# Altium PCB remote.PcbDoc (part 1 of 2)
Units mm, origin at the board's own origin, x right, y up, seen from the top; angles counter-clockwise.
Board outline 60.1 x 131.84 mm, 4 copper layers (Top Layer, Int1 (GND), Int2 (PWR), Bottom Layer), stack 1.569 mm thick; 97 components, 91 nets, 326 pads, 125 vias.
Unrouted connection lines stored in the file: 43.
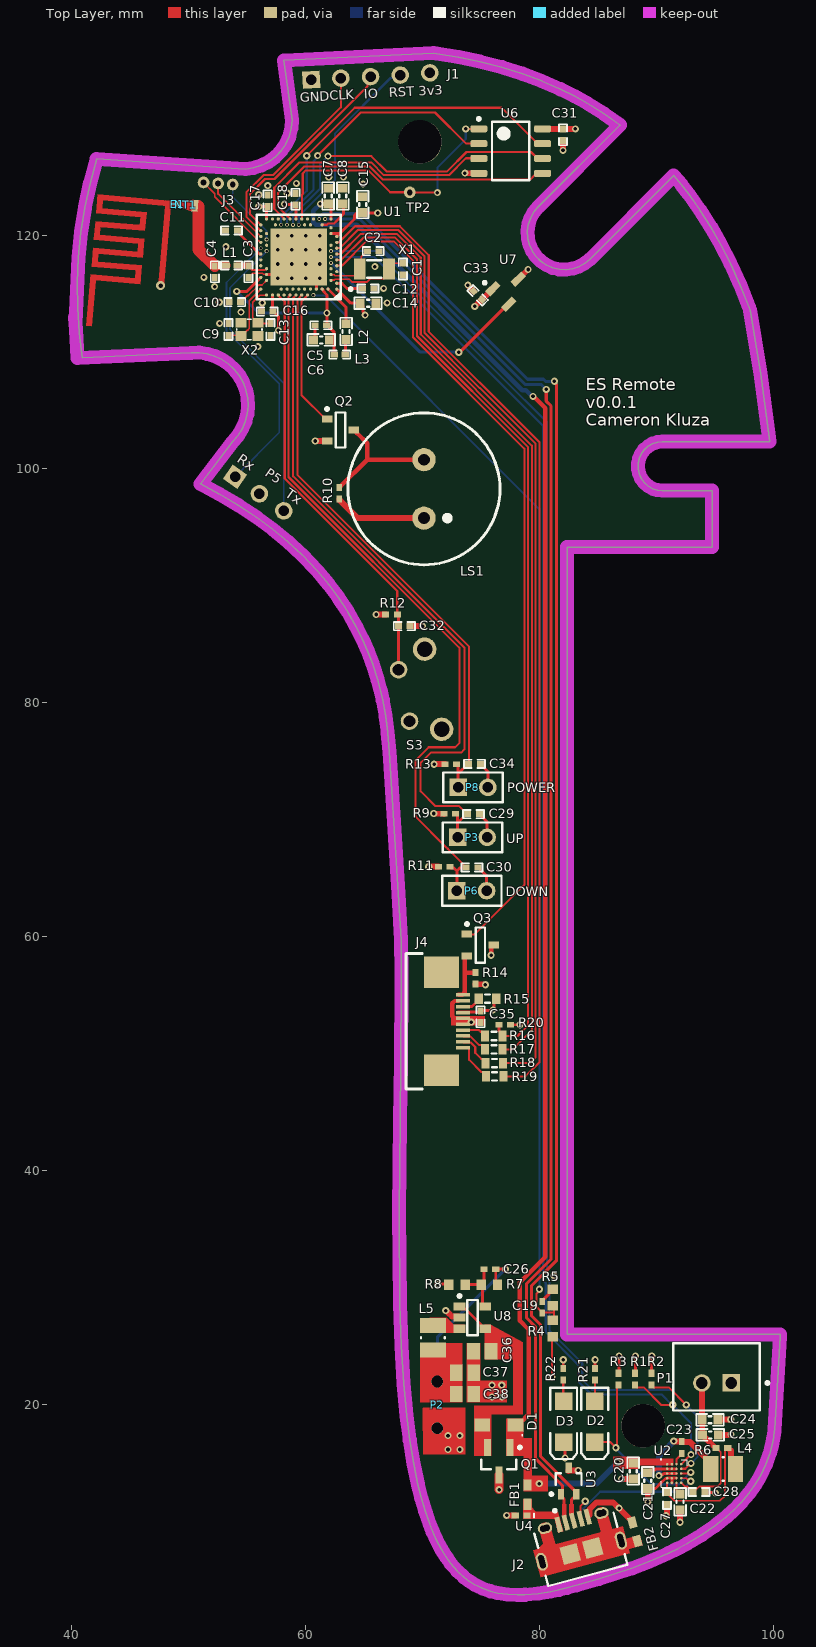
[diagram p0: Top Layer view]
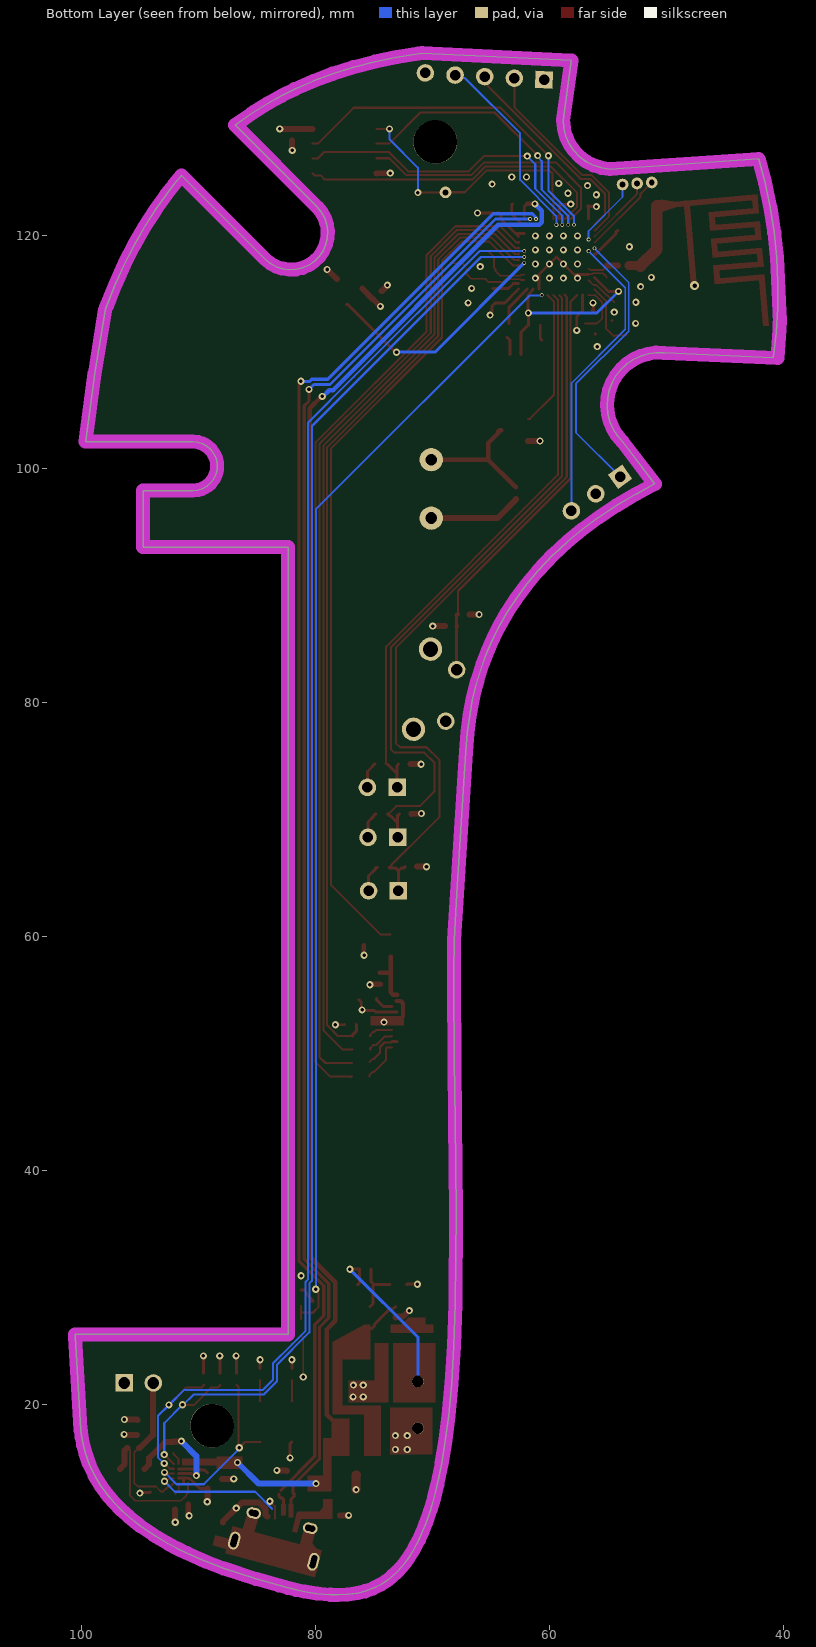
[diagram p1: Bottom Layer view, seen from below]
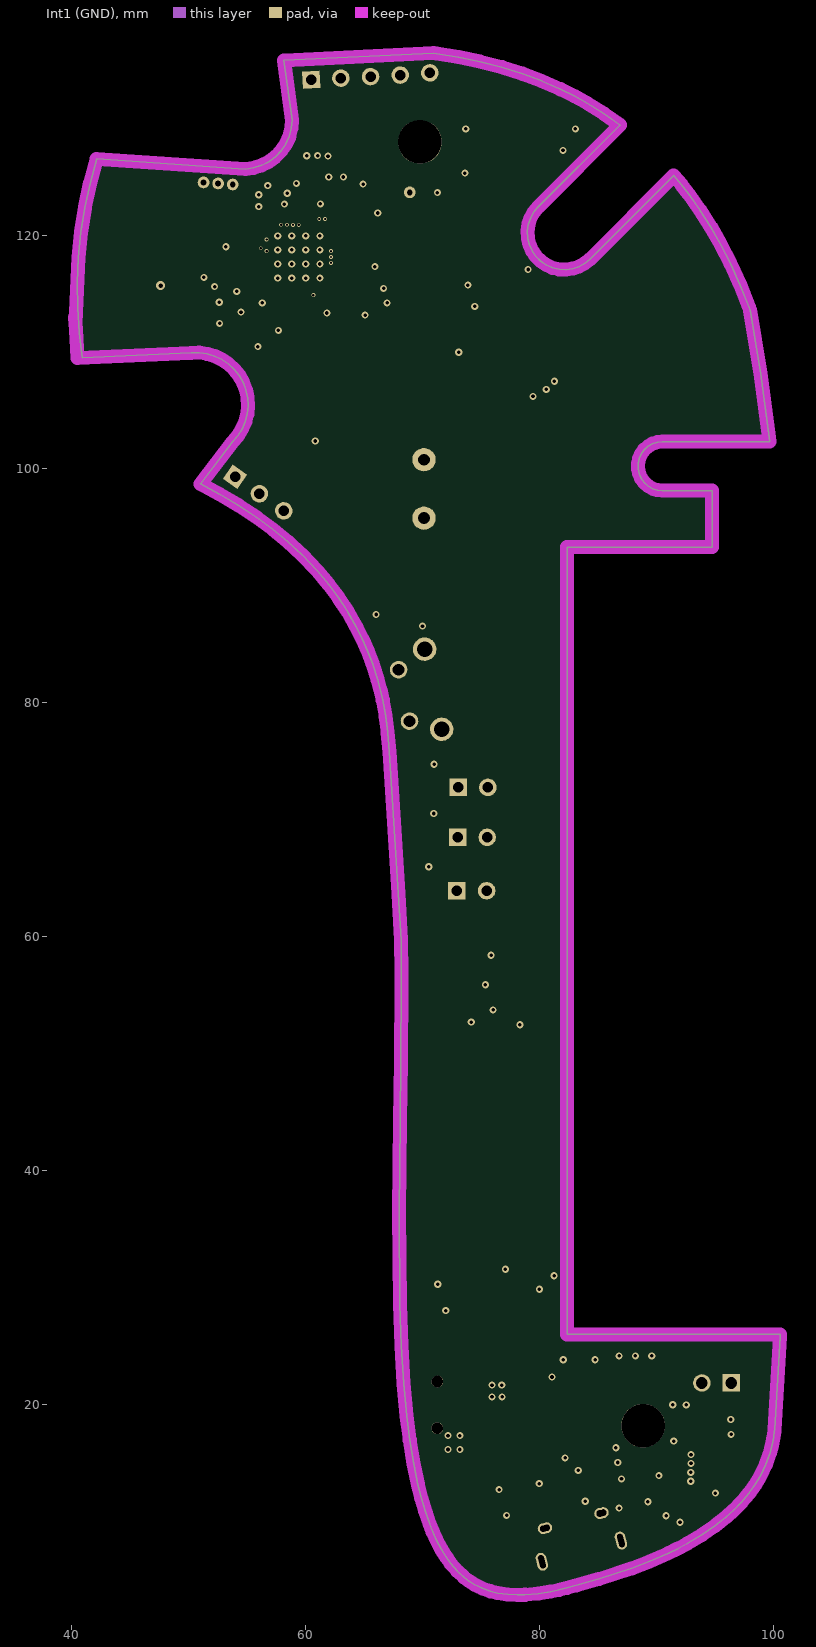
[diagram p2: Int1 (GND)]
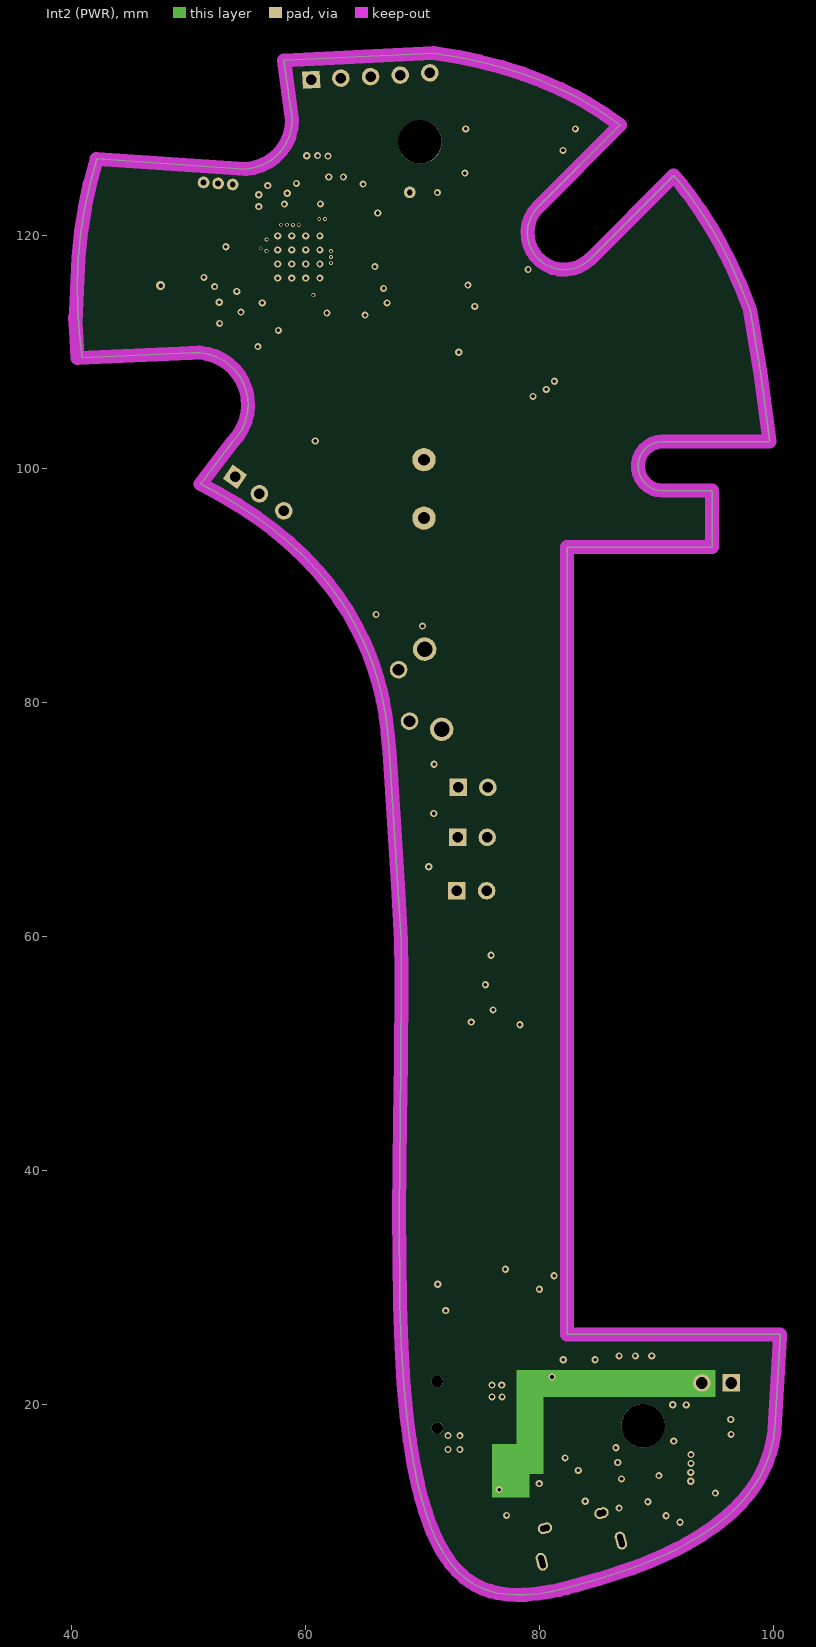
[diagram p3: Int2 (PWR)]

## Layer stack, top to bottom
Top Solder: solder mask 0.0254, SM-001, Dk 4
Top Layer: signal copper 0.035
Dielectric 1: prepreg 0.1999, PP-017, Dk 4.3
Int1 (GND): signal copper 0.0175
Dielectric 3: core 1.0643, Core-039, Dk 4.8
Int2 (PWR): signal copper 0.0175
Dielectric 5: prepreg 0.1999, PP-017, Dk 4.3
Bottom Layer: signal copper 0.035
Bottom Solder: solder mask 0.0254, SM-001, Dk 4

## Board outline
54.862,125.645 42.143,126.51 41.58,124.438 41.132,122.338 40.8,120.216 40.585,118.08 40.487,115.935 40.508,113.787 40.646,111.644 40.902,109.512 50.226,109.933 50.908,109.942 51.583,109.848 52.235,109.652 52.851,109.358 53.414,108.975 53.912,108.51 54.334,107.974 54.669,107.381 54.91,106.743 55.051,106.076 55.089,105.396 55.023,104.717 54.854,104.057 54.587,103.43 54.227,102.851 53.783,102.333 51.019,98.72 52.642,97.851 54.322,96.856 55.847,95.845 57.233,94.818 58.465,93.8 59.689,92.671 61.019,91.274 61.963,90.148 62.831,88.978 63.628,87.759 64.35,86.491 64.868,85.453 65.333,84.391 65.747,83.306 66.176,81.967 66.405,81.118 66.605,80.258 66.858,78.875 67.031,77.462 67.167,75.81 67.294,73.865 67.677,67.781 67.938,63.663 68.178,59.716 68.193,56.92 68.193,56.001 68.15,49.37 68.085,44.25 68.009,36.454 68.073,28.611 68.2,25.015 68.398,21.799 68.654,19.035 68.916,16.956 69.24,14.955 69.609,13.166 69.894,12.029 70.229,10.892 70.606,9.808 70.882,9.119 71.195,8.428 71.608,7.64 72.018,6.97 72.417,6.411 72.968,5.772 73.571,5.215 73.99,4.898 74.449,4.61 75.129,4.276 75.805,4.035 76.431,3.882 77.286,3.758 78.126,3.719 78.759,3.735 79.913,3.832 80.951,3.998 81.686,4.158 82.371,4.33 83.151,4.539 85.116,5.084 87.896,5.992 89.434,6.585 91.029,7.288 91.836,7.685 92.642,8.114 93.885,8.852 95.025,9.632 95.97,10.382 96.64,10.989 97.259,11.623 97.931,12.419 98.424,13.108 98.913,13.927 99.364,14.878 99.68,15.758 99.891,16.555 100.019,17.212 100.095,17.731 100.109,17.839 100.586,25.818 100.586,25.997 82.373,25.997 82.373,93.319 94.776,93.319 94.776,98.139 90.526,98.139 90.089,98.185 89.672,98.321 89.292,98.54 88.966,98.834 88.707,99.189 88.529,99.59 88.438,100.02 88.438,100.459 88.529,100.888 88.707,101.289 88.966,101.644 89.292,101.938 89.672,102.157 90.089,102.293 90.526,102.339 99.68,102.339 99.638,102.692 98.909,108.152 98.019,113.589 97.923,113.844 97.184,115.7 96.358,117.531 95.525,119.165 94.647,120.701 93.725,122.147 92.759,123.506 92.137,124.308 91.486,125.093 84.354,117.961 83.907,117.59 83.399,117.307 82.848,117.122 82.272,117.042 81.691,117.069 81.126,117.202 80.594,117.436 80.114,117.765 79.703,118.176 79.375,118.655 79.14,119.187 79.007,119.753 78.98,120.334 79.06,120.909 79.245,121.46 79.528,121.968 79.899,122.415 86.892,129.409 85.503,130.39 84.054,131.288 82.948,131.9 81.812,132.466 80.196,133.175 78.555,133.791 76.786,134.351 74.932,134.833 73.075,135.219 71.213,135.521 70.933,135.56 58.148,134.935 58.856,129.84 58.797,129.133 58.619,128.446 58.327,127.799 57.932,127.211 57.443,126.697 56.874,126.273 56.242,125.951 55.565,125.739

## Design rules (kind name [scope] priority, off if disabled: settings)
BoardOutlineClearance [All] p1: gap=0.254 ignorepadtopadclearanceinfootprint=FALSE except(0: Arc-SplitContinuation Track-SplitContinuation SMDPad-SplitContinuation THPad-SplitContinuation Via-SplitContinuation Fill-SplitContinuation Poly-SplitContinuation Region-SplitContinuation Text-SplitContinuation)
Clearance Polygon_ANT [(InNamedPolygon('Top_Layer-GND')) or  (InNamedPolygon('Mid_Layer_1-GND')) or (InNamedPolygon('Mid_Layer_2-GND')) or (InNamedPolygon('Bottom_Layer-GND')) vs InNet('PCB_ANT')] p1: gap=0.254 ignorepadtopadclearanceinfootprint=FALSE
Clearance Polygon [(InNamedPolygon('Top_Layer-GND')) or  (InNamedPolygon('Mid_Layer_1-GND')) or (InNamedPolygon('Mid_Layer_2-GND')) or (InNamedPolygon('Bottom_Layer-GND'))] p2: gap=0.254 ignorepadtopadclearanceinfootprint=FALSE except(0: Arc-Hole Track-Hole SMDPad-Hole THPad-Hole Via-Hole Fill-Hole Poly-Hole Region-Hole Text-Hole)
Clearance Clearance_Top [OnLayer('Top Layer')] p3: gap=0.145 ignorepadtopadclearanceinfootprint=FALSE except(0: Arc-Hole Track-Hole SMDPad-Hole THPad-Hole Via-Hole Fill-Hole Poly-Hole Region-Hole Text-Hole)
Clearance [All] p4: gap=0.15 ignorepadtopadclearanceinfootprint=FALSE
ComponentClearance [All] p1 off: gap=0.254 collisioncheckmode=3 verticalgap=0.254 showdistances=FALSE
DiffPairsRouting [All] p1: maxlimit=0.254 minlimit=0.127 mostfreqgap=0.254 toplayer_minwidth=0.178 toplayer_maxwidth=0.381 toplayer_prefwidth=0.351 midlayer1_mingap=0.254 midlayer1_minwidth=0.381 midlayer1_maxwidth=0.381 midlayer1_prefwidth=0.381 midlayer2_mingap=0.254 midlayer2_minwidth=0.381 midlayer2_maxwidth=0.381 midlayer2_prefwidth=0.381 bottomlayer_minwidth=0.178 bottomlayer_maxwidth=0.381 bottomlayer_prefwidth=0.351 maxuncoupledlength=12.7
FabricationTestPointUsage TestPointUsage [All] p1: valid=0 allowmultiple=FALSE
FabricationTestpoint Testpoint [All] p1: side=3 testpointundercomponent=TRUE minsize=1.016 maxsize=2.54 preferedsize=1.524 minholesize=0 maxholesize=1.016 preferedholesize=0.813 testpointgrid=0.025 allowsidetop=TRUE allowsidebottom=TRUE usegrid=TRUE gridtolerance=0
Height [All] p1 off: minheight=0 maxheight=25.4 prefheight=12.7
HoleSize [All] p1: absolutevalues=TRUE maxlimit=4.064 minlimit=0.178 maxpercent=80.000 minpercent=20.000
MinimumAnnularRing [All] p1 off: minimumring=0.152
PolygonConnect PolygonConnect_1 [isVia and innet(gnd)] p1: connectstyle=Direct reliefconductorwidth=0.254 reliefentries=4 polygonreliefangle="90 Angle" airgapwidth=0.254
PolygonConnect [All] p2: connectstyle=Relief reliefconductorwidth=0.254 reliefentries=4 polygonreliefangle="90 Angle" airgapwidth=0.254
RoutingVias [All] p1: holewidth=0.305 width=0.61 viastyle="Through Hole" minholewidth=0.203 minwidth=0.457 maxholewidth=0.61 maxwidth=0.61
SilkToSilkClearance [All] p1: silktosilkclearance=0.152
SilkToSolderMaskClearance SilkscreenOverComponentPads [IsPad] p1: minsilkscreentomaskgap=0 clearancetoexposedcopper=TRUE
SolderMaskExpansion [All] p1: expansion=0.076 istentingtop=FALSE
Width [All] p1: maxlimit=2 minlimit=0.145 preferedwidth=0.15 minimp=50.000000 maximp=50.000000 favimp=50.000000
22 further rules are at their usual default settings.

## Classes and differential pairs
differential pair class USB: USB
net class UART: A8 A10 A12 A14 A16 A20 K2 M2 P2 P23 R24
net class QSPI: AC15 AC17 AC19 AD12 AD16 AD18
net class LCD: J1 L1 N1 R1 U1
component class Power: C19 C20 C21 C22 C23 C24 C25 C26 C27 C28 C36 C37 C38 D1 D2 D3 FB1 FB2 J2 L4 L5 P1 P2 Q1 R1 R2 R3 R4 R5 R6 R7 R8 R21 R22 U2 U3 U4 U8
component class Peripherals: C29 C30 C31 C32 C33 C34 C35 J1 LS1 P3 P5 P6 P8 Q2 Q3 R9 R10 R11 R12 R13 R14 R15 R16 R17 R18 R19 R20 S3 TP2 U6 U7
component class nrf52840: C1 C2 C3 C4 C5 C6 C7 C8 C9 C10 C11 C12 C13 C14 C15 C16 C17 C18 E1 J3 L1 L2 L3 NT1 U1 X1 X2
differential pair USB: +USB_P -USB_N

## Components (designator, comment, footprint, x,y, rotation, side; value= is the part's Value field where it differs from the comment)
C1 "0402/NP0" CAPC1005X04L 68.326,117.094 r270 top value=12pF
C2 "0402/NP0" CAPC1005X04L 65.794,118.618 r0 top value=12pF
C3 "0402/NP0" CAPC1005X04L 55.115,116.867 r270 top value=0.8pF
C4 "0402/NP0" CAPC1005X04L 52.242,116.867 r270 top value=0.5pF
C5 "0402/X7R" CAPC1005X04L 61.312,112.287 r180 top value=47nF
C6 "0603/X7R" CAPC1608X06L 61.355,111.029 r180 top value=1uF
C7 "0603/X7S" CAPC1608X06L 61.94,123.332 r90 top value=4.7uF
C8 "0603/X7R" CAPC1608X06L 63.198,123.332 r90 top value=4.7uF
C9 "0402/NP0" CAPC1005X04L 53.409,111.927 r270 top value=12pF
C10 "0402/NP0" CAPC1005X04L 53.948,114.262 r180 top value=100pF
C11 "0402/NP0" CAPC1005X04L 53.67,120.396 r180 top value=802pF
C12 "0402/X7R" CAPC1005X04L 65.353,115.43 r0 top value=100nF
C13 "0402/NP0" CAPC1005X04L 57.001,111.927 r90 top value=12pF
C14 "0603/X7R" CAPC1608X06L 65.353,114.173 r0 top value=1uF
C15 "0603/X7R" CAPC1608X06L 64.897,122.606 r90 top value=4.7uF
C16 "0402/X7R" CAPC1005X04L 56.732,113.454 r180 top value=100nF
C17 "0402/X7R" CAPC1005X04L 56.769,122.936 r90 top value=100nF
C18 "0402/X7R" CAPC1005X04L 59.156,123.063 r270 top value=100nF
C19 "0402/X7R" 0402 80.239,28.321 r90 top value=10nF
C20 "0603/X7R" CAPC1608X06L 88.017,14.307 r270 top value=1uF
C21 "0603/X7S" CAPC1608X06L 89.262,13.494 r270 top value=4.7uF
C22 "0603/X7R" CAPC1608X06L 92.024,11.684 r270 top value=1uF
C23 "0402/16V/X7R" 0402 92.177,16.332 r270 top value=33nF
C24 "0603/X5R" CAPC1608X06L 94.59,18.694 r0 top value=10uF
C25 "0603/X5R" CAPC1608X06L 94.615,17.399 r0 top value=10uF
C26 "0402/NP0" 0402 75.768,31.572 r180 top value=22pF
C27 "0402/X7R" CAPC1005X04L 90.913,11.97 r90 top value=0.1uF
C28 "0402/X7R" CAPC1005X04L 93.65,12.522 r180 top value=0.1uF
C29 "0402/X7R" CAPC1005X04L 74.371,70.485 r180 top value=0.1uF
C30 "0402/X7R" CAPC1005X04L 74.244,65.938 r180 top value=0.1uF
C31 "0402/X7R" CAPC1005X04L 82.017,128.575 r90 top value=0.1uF
C32 "0402/X7R" CAPC1005X04L 68.453,86.563 r180 top value=0.1uF
C33 "0402/X7R" CAPC1005X04L 74.723,114.838 r315 top value=0.1uF
C34 "0402/X7R" CAPC1005X04L 74.447,74.778 r180 top value=0.1uF
C35 "0402/X7R" CAPC1005X04L 74.981,53.162 r90 top value=0.1uF
C36 "0805/X5R" C0805 75.121,24.562 r180 top value=22uF
C37 "0805/X5R" C0805 73.635,22.708 r0 top value=22uF
C38 "0805/X5R" C0805 73.635,20.904 r0 top value=22uF
D1 "MBR120" SODFL360X98-2N 76.53,18.237 r180 top
D2 "Charge stat (yellow)" 3.2X1.6X1.1 84.734,18.542 r270 top
D3 "PWR On (green)" 3.2X1.6X1.1 82.067,18.542 r270 top
E1 "Cypress AN91445 MIFA" Cypress_AN91445_MIFA 44.577,119.507 r85 top
FB1 "180R/2A" MURA-BLM18PG_KG-B25-CHIP-2_V2 78.994,12.294 r270 top
FB2 "180R/2A" MURA-BLM18PG_KG-B25-CHIP-2_V2 88.163,9.119 r105 top
J1 "SWD" "SWD 5-pin" 65.561,133.547 r3 top
J2 "10118194-0001LF" FCI-10118194-0001LF-5_V 83.241,8.767 r15 top
J3 "DBG_GPIO" DBG_Header 52.527,124.409 r86 top
J4 "CFAF128128B1" 68711014022 73.482,52.769 r270 top
L1 "4.7nH" INDC1005X04L 53.679,117.405 r180 top
L2 "10uH" INDC1608X06L 63.467,111.748 r90 top
L3 "15nH" INDC1005X04L 62.928,109.772 r0 top
L4 "1uH/2.7A" INDC2520X12N 95.707,14.478 r0 top value=1uH
L5 "2.2uH/2.27A" INDC2520X12N 70.891,25.717 r270 top value=1uH
LS1 "PS1240P02BT" "Passive Buzzer" 70.129,98.298 r90 top
NT1 "Net Tie" MIFA_NET_TIE 49.779,122.57 r355 top net-tie
P1 "Battery" JST-B2B-XH-A_V 95.143,21.844 r180 top
P2 "Header 2" Current_TP 71.272,19.964 r90 top
P3 "UP" HDR1X2 73,68.504 r0 top
P5 "Header 3" UART 56.06,97.875 r325 top
P6 "DOWN" HDR1X2 72.949,63.932 r0 top
P8 "POWER" HDR1X2 73.05,72.771 r0 top
Q1 "SSM3J378R" SOT-23_M 76.53,15.164 r270 top
Q2 "2N7002NXBKR" SOT190P230X110-3N 62.992,103.327 r0 top
Q3 "2N7002NXBKR" SOT190P230X110-3N 74.955,59.284 r0 top
R1 "10k/0402" 0402 88.189,22.174 r90 top
R2 "10k/0402" 0402 89.586,22.174 r90 top
R3 "10k/0402" 0402 86.766,22.174 r90 top
R4 "4.02M/0603" 1608[0603] 81.153,26.492 r270 top
R5 "10M/0603" 1608[0603] 81.128,29.154 r270 top
R6 "68m/0.25W/0402" 0402 95.606,16.281 r0 top
R7 "0603/210k" 1608[0603] 75.717,30.251 r0 top
R8 "0603/47k" 1608[0603] 72.949,30.251 r0 top
R9 "10k/0402" 0402 72.339,70.51 r180 top
R10 "10k/0402" 0402 62.89,97.917 r270 top
R11 "10k/0402" 0402 71.857,65.989 r180 top
R12 "10k/0402" 0402 67.361,87.554 r180 top
R13 "10k/0402" 0402 72.415,74.752 r180 top
R14 "100k/0402" 0402 74.524,56.439 r90 top
R15 "Resistor" J1-0603 75.565,54.712 r0 top value=0
R16 "Resistor" J1-0603 76.098,51.511 r0 top value=0
R17 "Resistor" J1-0603 76.098,50.368 r0 top value=0
R18 "Resistor" J1-0603 76.149,49.2 r0 top value=0
R19 "Resistor" J1-0603 76.175,48.057 r0 top value=0
R20 "100k/0402" 0402 77.038,52.476 r180 top
R21 "10k/0402" 0402 84.76,22.581 r90 top
R22 "10k/0402" 0402 82.042,22.581 r90 top
S3 "PTS645VJK" SW_CK_PTS645VJK612LFS 69.672,80.899 r282 top
TP2 "TP_Via" TP_Via 68.91,123.647 r90 top
U1 "NRF52840-QIAA-R7" LIBRARYSOURCE=Vault 59.426,118.124 r180 top
U2 "BQ24157YFFR" BQ24157YFFR 91.526,14.103 r0 top
U3 "ESD7002" SOT65P220X100-3N 82.499,13.462 r90 top
U4 "TPD1E05U06DPYR" 0402-A 78.435,10.516 r180 top
U6 "IS25LQ040B" SOIC127P600X175-8N 77.546,127.178 r0 top
U7 "DRV5053" SOT190P237X112-3N 77.445,115.494 r45 top
U8 "AP3429AKTTR-G1" SOT95P280X100-5N 74.27,27.432 r0 top
X1 "32.768kHz" XTAL_3215 65.893,117.094 r0 top
X2 "32MHz" BT-XTAL_2016 55.205,111.927 r0 top

## Footprints (in the part's own frame and the unit in brackets; to place one, negate y for a bottom-side part, rotate by r counter-clockwise, add the part's x,y. Pads: shape width x height; smd on the part's side, far side on the other; paste and mask are expansions set on the pad)
3.2X1.6X1.1 [mm] "SMT LED; 2 Flat Leads"
  rect 1.5x1.5 smd: 1(-1.75,0) 2(1.75,0)
  silkscreen extent -2.9,-1.15 3.2,1.15
0402 [mm] "Chip Capacitor, Body 1.0x0.5mm, IPC High Density"
  rect 0.6x0.5 smd: 1(-0.5,0) 2(0.5,0)
  body extent -0.55,-0.3 0.55,0.3, height 1.3
0402-A [mm] "Chip Inductor, Body 1.0x0.5mm, IPC High Density"
  rect 0.6x0.5 smd: 1(-0.5,0) 2(0.5,0)
  silkscreen extent -1.1,-0.15 -1.1,0.15, body extent -0.55,-0.3 0.55,0.3, height 0.55
1608[0603] [mm] "Chip Capacitor, Body 1.6x0.8mm, IPC High Density"
  rect 0.8x0.9 smd: 1(-0.7,0) 2(0.7,0)
  body extent -0.87,-0.48 0.87,0.48, height 1.3
68711014022 [mm] "10 Position FPC Connector Contacts, Top 0.020\" (0.50mm) Surface Mount, Right Angle"
  rect 0.3x1.2 smd: 1(-2.25,0) 2(-1.75,0) 3(-1.25,0) 4(-0.75,0) 5(-0.25,0) 6(0.25,0) 7(0.75,0) 8(1.25,0) 9(1.75,0) 10(2.25,0)
  rect 2.7x3 smd: MP1(-4.18,-1.86) MP2(4.18,-1.86)
  silkscreen extent -5.8,-4.87 5.8,-3.5, body extent -5.7,-4.8 5.7,0.3, height 2.06
BQ24157YFFR [mm]
  round 0.2 smd: A1(-0.6,0.8) A2(-0.2,0.8) A3(0.2,0.8) A4(0.6,0.8) B1(-0.6,0.4) B2(-0.2,0.4) B3(0.2,0.4) B4(0.6,0.4) C1(-0.6,0) C2(-0.2,0) C3(0.2,0) C4(0.6,0) D1(-0.6,-0.4) D2(-0.2,-0.4) D3(0.2,-0.4) D4(0.6,-0.4) E1(-0.6,-0.8) E2(-0.2,-0.8) E3(0.2,-0.8) E4(0.6,-0.8)
  silkscreen extent -1.18,-1.17 1.1,1.26, body extent -1,-1.02 1,1.02, height 1.27
BT-XTAL_2016 [mm]
  rect 0.95x0.85 smd: 1(-0.725,-0.575) 2(0.725,-0.575) 3(0.725,0.575) 4(-0.725,0.575)
  silkscreen extent -1.08,-0.88 1.08,0.88, body extent -1.05,-0.85 1.05,0.85, height 0.56
C0805 [mm] "Chip Capacitor, Body 2.0x1.3mm, IPC High Density"
  rect 1.1x1.4 smd: 1(-0.75,0) 2(0.75,0)
  body extent -1.1,-0.72 1.1,0.72, height 1.4
CAPC1005X04L [mm]
  rect 0.6x0.5 smd: 1(-0.5,0) 2(0.5,0)
  silkscreen extent -0.9,-0.35 0.9,0.35, body extent -0.51,-0.25 0.51,0.25, height 0.5
CAPC1608X06L [mm]
  rect 0.75x0.8 smd: 1(-0.675,0) 2(0.675,0)
  silkscreen extent -1.17,-0.5 1.18,0.5, body extent -0.8,-0.43 0.8,0.43, height 0.8
Current_TP [mm]
  round 1 hole 1 mask+0: 1(-2,0)
  round 1 hole 1 paste+0 mask+0: 2(2,0)
  Top Layer circle w1.5: c2,0 r0.508
  Top Layer circle w1.5: c-2,0 r0.508
  Top Layer region: 0.25,-1.27 2.21,-1.27 2.21,1.27 0.25,1.27
  Top Layer region: -2.21,-1.27 -0.25,-1.27 -0.25,1.27 -2.21,1.27
Cypress_AN91445_MIFA [mil] "Cypress app note 91445 MIFA reference implementation for BLE"
  rect 20x20 smd paste+0 mask+4: 1(138,-163.5)
  Top Layer region: -144.85,-144.22 148.15,-144.22 148.15,-124.22 -144.85,-124.22
  Top Layer region: -296.85,85.77 -121.85,85.77 -121.85,105.77 -296.85,105.77
  Top Layer region: -121.85,-64.23 -121.85,105.77 -141.85,105.77 -141.85,-64.23
  Top Layer region: -141.85,-64.23 -76.85,-64.23 -76.85,-44.23 -141.85,-44.23
  Top Layer region: -76.85,-64.23 -76.85,105.77 -96.85,105.77 -96.85,-64.23
  Top Layer region: -96.85,85.77 -31.85,85.77 -31.85,105.77 -96.85,105.77
  Top Layer region: -31.85,-64.23 -31.85,105.77 -51.85,105.77 -51.85,-64.23
  Top Layer region: -51.85,-64.23 13.15,-64.23 13.15,-44.23 -51.85,-44.23
  Top Layer region: 13.15,-64.23 13.15,105.77 -6.85,105.77 -6.85,-64.23
  Top Layer region: -6.85,85.78 58.15,85.78 58.15,105.78 -6.85,105.78
  Top Layer region: 58.15,-64.23 58.15,105.77 38.15,105.77 38.15,-64.23
  Top Layer region: 38.15,-64.23 103.15,-64.23 103.15,-44.23 38.15,-44.23
  Top Layer region: 103.15,-64.23 103.15,105.77 83.15,105.77 83.15,-64.23
  Top Layer region: 83.15,85.77 148.15,85.77 148.15,105.77 83.15,105.77
  Top Layer region: 148.15,-174.23 148.15,105.77 128.15,105.77 128.15,-174.23
DBG_Header [mm]
  round 1 hole 0.5: 1(0,1.25) 2(0,0) 3(0,-1.25)
FCI-10118194-0001LF-5_V [mm] "SMD, 5-Leads, Body 7x5mm, Pitch 0.65 mm"
  rect 0.4x1.35 smd: 1(-1.3,1.35) 2(-0.65,1.35) 3(0,1.35) 4(0.65,1.35) 5(1.3,1.35)
  oval 1.25x0.95 hole 0.55 slot 0.85 at 0 deg: 6(-2.5,1.35) 7(2.5,1.35)
  oval 0.9x1.55 hole 0.5 slot 1.15 at 90 deg: 8(-3.5,-1.35) 9(3.5,-1.35)
  rect 1.5x1.55 smd: 10(-1,-1.35) 11(1,-1.35)
  Top Layer region: -2.3,-2.125 -2.3,-0.575 -3.5,-0.575 -3.5,-2.125
  Top Layer region: 3.5,-2.125 3.5,-0.575 2.3,-0.575 2.3,-2.125
  silkscreen extent -3.5,-3.5 3.5,2.7, body extent -4.02,-4.03 4.02,1.55, height 2.72
HDR1X2 [mm] "Connector; Header; 2 Position"
  rect 1.5x1.5 hole 0.9: 1(0,0)
  round 1.5 hole 0.9: 2(2.54,0)
  silkscreen extent -1.27,-1.27 3.81,1.27
INDC1005X04L [mm]
  rect 0.65x0.5 smd: 1(-0.475,0) 2(0.475,0)
  silkscreen extent -0.9,-0.35 0.9,0.35, body extent -0.5,-0.3 0.5,0.3, height 0.5
INDC1608X06L [mm] "Chip Inductor, 2-Leads, Body 1.6x0.8mm, IPC High Density"
  rect 0.75x0.8 smd: 1(-0.675,0) 2(0.675,0)
  silkscreen extent -1.18,-0.5 1.18,0.5, body extent -0.8,-0.48 0.8,0.48, height 0.8
INDC2520X12N [mm] "Chip Inductor, 2-Leads, Body 2.50x2.00mm, IPC Medium Density"
  rect 1.29x2.22 smd: 1(-1.055,0) 2(1.055,0)
  silkscreen extent -0.05,-1.01 0.05,1.01, body extent -1.35,-1.1 1.35,1.1, height 1.2
J1-0603 [mm] "Chip Resistor, Body 1.6x0.8mm, IPC High Density"
  rect 0.7x0.9 smd: 1(-0.75,0) 2(0.75,0)
  silkscreen extent -0.2,-0.35 0.2,0.35, body extent -0.85,-0.48 0.85,0.48, height 0.9
JST-B2B-XH-A_V [mm] "Header, 2-Leads, Body 7.4x5.75mm, Pitch 2.5mm"
  rect 1.5x1.5 hole 1: 1(-1.25,0)
  round 1.5 hole 1: 2(1.25,0)
  silkscreen extent -4.47,-3.4 3.7,2.35, body extent -3.7,-3.4 3.7,2.35, height 7
LIBRARYSOURCE=Vault [mm]
  rect 4.85x4.85 smd mask+0.05: 74(0,0)
  round 0.275 smd paste+0.012 mask+0.05: A8(-1.25,3.25) A10(-0.75,3.25) A12(-0.25,3.25) A14(0.25,3.25) A16(0.75,3.25) A18(1.25,3.25) A20(1.75,3.25) A22(2.25,3.25) A23(2.75,3.25) AA24(3.25,-2.25) AB2(-2.75,-2.5) AC5(-2,-2.75) AC9(-1,-2.75) AC11(-0.5,-2.75) AC13(0,-2.75) AC15(0.5,-2.75) AC17(1,-2.75) AC19(1.5,-2.75) AC21(2,-2.75) AC24(3.25,-2.75) AD2(-2.75,-3.25) AD4(-2.25,-3.25) AD6(-1.75,-3.25) AD8(-1.25,-3.25) AD10(-0.75,-3.25) AD12(-0.25,-3.25) AD14(0.25,-3.25) AD16(0.75,-3.25) AD18(1.25,-3.25) AD20(1.75,-3.25) AD22(2.25,-3.25) AD23(2.75,-3.25) B1(-3.25,2.75) B3(-2.5,2.75) B5(-2,2.75) B7(-1.5,2.75) B9(-1,2.75) B11(-0.5,2.75) B13(0,2.75) B15(0.5,2.75) B17(1,2.75) B19(1.5,2.75) B24(3.25,2.75) C1(-3.25,2.25) D2(-2.75,2) D23(2.75,2) E24(3.25,1.75) F2(-2.75,1.5) F23(2.75,1.5) G1(-3.25,1.25) H2(-2.75,1) H23(2.75,1) J1(-3.25,0.75) J24(3.25,0.75) K2(-2.75,0.5) L1(-3.25,0.25) L24(3.25,0.25) M2(-2.75,0) N1(-3.25,-0.25) N24(3.25,-0.25) P2(-2.75,-0.5) P23(2.75,-0.5) R1(-3.25,-0.75) R24(3.25,-0.75) T2(-2.75,-1) T23(2.75,-1) U1(-3.25,-1.25) U24(3.25,-1.25) V23(2.75,-1.5) W1(-3.25,-1.75) W24(3.25,-1.75) Y2(-2.75,-2) Y23(2.75,-2)
  silkscreen extent -4.57,-3.6 3.6,3.6, body extent -3.55,-3.55 3.55,3.55, height 0.85
MIFA_NET_TIE [mil]
  rect 20x40 smd paste+0 mask+0: 1(30,0)
  rect 20x20 smd mask+4: 2(-30,0)
  Top Layer region: -20.5,9.87 -20.5,-9.87 20,-20 25,-20 25,20 20,20
MURA-BLM18PG_KG-B25-CHIP-2_V2 [mm] "Chip Ferrite Bead, 2-Leads, Body 1.6x0.8mm, Pitch 1.65mm, Flow Soldering, 35/70um Land Pad Thickness"
  rect 0.95x0.7 smd: 1(-0.825,0) 2(0.825,0)
  body extent -0.87,-0.48 0.88,0.48, height 0.95
"Passive Buzzer" [mm]
  round 2 hole 1: 1(-2.5,0) 2(2.5,0)
  silkscreen extent -6.5,-6.5 6.5,6.5
SODFL360X98-2N [mm] "SODFL, 2-Leads, Body 1.65x3.60mm, IPC Medium Density"
  rect 1.35x1.1 smd: 1(-1.425,0) 2(1.425,0)
  silkscreen extent -2.05,0.8 -1.95,0.9, body extent -1.45,-0.9 1.45,0.9, height 0.98
SOIC127P600X175-8N [mm] "SOIC, 8-Leads, Body 4.90x3.90mm, Pitch 1.27mm, IPC Medium Density"
  rrect50% 1.45x0.6 smd: 1(-2.725,1.905) 2(-2.725,0.635) 3(-2.725,-0.635) 4(-2.725,-1.905) 5(2.725,-1.905) 6(2.725,-0.635) 7(2.725,0.635) 8(2.725,1.905)
  silkscreen extent -2.85,-2.5 1.6,2.88, body extent -2,-2.5 2,2.5, height 1.75
SOT65P220X100-3N [mm] "SOT23, 3-Leads, Body 2.00x2.20mm, Pitch 0.65mm, IPC Medium Density"
  rect 0.9x0.55 smd: 1(-1.125,0.65) 2(-1.125,-0.65) 3(1.125,0)
  silkscreen extent -1.25,-1.1 0.68,1.6, body extent -0.67,-1.1 0.67,1.1, height 1
SOT95P280X100-5N [mm] "SOT23, 5-Leads, Body 2.90x2.80mm, Pitch 0.95mm, IPC Medium Density"
  rect 1x0.7 smd: 1(-1.099,0.95) 2(-1.099,0) 3(-1.099,-0.95) 4(1.099,-0.95) 5(1.099,0.95)
  silkscreen extent -1.22,-1.5 0.45,1.97, body extent -0.85,-1.5 0.85,1.5, height 1
SOT190P230X110-3N [mm] "SOT223, 3-Leads, Body 2.90x2.30mm (avg), Pitch 1.90mm, IPC Medium Density"
  rect 0.9x0.6 smd: 1(-1.15,0.95) 2(-1.15,-0.95) 3(1.15,0)
  silkscreen extent -1.27,-1.5 0.4,1.92, body extent -0.7,-1.5 0.7,1.5, height 1.1
SOT190P237X112-3N [mm] "SOT223, 3-Leads, Body 2.92x2.37mm (avg), Pitch 1.90mm, IPC Medium Density"
  rect 1.3x0.6 smd: 1(-1.05,0.95) 2(-1.05,-0.95) 3(1.05,0)
  silkscreen extent -1.32,1.68 -1.08,1.92, body extent -0.7,-1.52 0.7,1.52, height 1.12
SOT-23_M [mm] "SOT23, 3-Leads, Body 2.9x1.3mm, Pitch 0.95mm, Lead Span 2.5mm, IPC Low Density"
  rect 1.45x0.6 smd: 1(-1.175,0.95) 2(-1.175,-0.95) 3(1.175,0)
  silkscreen extent -1.3,-1.5 0.7,1.93, body extent -0.7,-1.5 0.7,1.5, height 1.1
SW_CK_PTS645VJK612LFS [mm] "Tactile Switch SPST-NO Side Actuated Through Hole, Right Angle"
  round 1.5 hole 1: 1(-2.25,-1.275) 2(2.25,-1.275)
  round 2 hole 1.3: 3(-3.5,1.275) 4(3.5,1.275)
"SWD 5-pin" [mm] "5-pin SWD connector"
  rect 1.5x1.5 hole 0.9: 1(-5.08,0)
  round 1.5 hole 0.9: 2(-2.54,0) 3(0,0) 4(2.54,0) 5(5.08,0.051)
TP_Via [mm] "Test Point Via"
  round 1 hole 0.5: 1(0,0)
UART [mm] "3-pin UART 100mil header"
  rect 1.5x1.5 hole 0.9: 1(-2.54,0)
  round 1.5 hole 0.9: 2(0,0) 3(2.54,0)
XTAL_3215 [mm]
  rect 1x1.8 smd: 1(-1.25,0) 2(1.25,0)
  silkscreen extent -0.6,-0.75 0.6,0.75, body extent -1.6,-0.75 1.6,0.75, height 0.81

## Part data
C1 C2 C3 C4 C5 C6 C7 C8 C9 C10 C11 C12 C13 C14 C15 C16 C17 C18 C19 C20 C21 C22 C23 C24 C25 C26 C27 C28 C29 C30 C31 C32 C33 C34 C35 C36 C37 C38: library part Cap, "Capacitor", ComponentLink1Description=Digikey, LatestRevisionDate=17-Jul-2002, LatestRevisionNote="Re-released for DXP Platform.", PackageDescription="Radial Cap, Thru-Hole; 2 Leads; 0.3 in Pin Spacing", PackageReference=RAD-0.3, Published=8-Jun-2000, Publisher="Altium Limited"
  C1 C2 C9 C13: ComponentLink1URL=https://www.digikey.com/product-detail/en/walsin-technology-corporation/0402N120G500CT/1292-1250-1-ND/9355254
  C3: ComponentLink1URL=https://www.digikey.com/product-detail/en/johanson-technology-inc/500R07S0R8AV4T/712-1604-1-ND/6612940
  C4: ComponentLink1URL=https://www.digikey.com/product-detail/en/johanson-technology-inc/500R07S0R5AV4T/712-1247-1-ND/1786709
  C5: ComponentLink1URL=https://www.digikey.com/product-detail/en/w-rth-elektronik/885012205035/732-7530-1-ND/5454157
  C6 C14 C20 C22: ComponentLink1URL=https://www.digikey.com/product-detail/en/avx-corporation/0603YC105JAT2A/478-10814-1-ND/7536449
  C7 C21: ComponentLink1URL=https://www.digikey.com/product-detail/en/tdk-corporation/C1608X7S1A475K080AC/445-14258-1-ND/3955924
  C8 C15: ComponentLink1URL=https://www.digikey.com/product-detail/en/samsung-electro-mechanics/CL10B475KQ8NQNC/1276-2087-1-ND/3890173
  C10: ComponentLink1URL=https://www.digikey.com/product-detail/en/samsung-electro-mechanics/CL05C101JB5NNNC/1276-1025-1-ND/3889111
  C11: ComponentLink1URL=https://www.digikey.com/product-detail/en/samsung-electro-mechanics/CL05C821JB5NNNC/1276-1727-1-ND/3889813
  C12 C16 C17 C18 C27 C28 C29 C30 C31 C32 C33 C34 C35: ComponentLink1URL=https://www.digikey.com/product-detail/en/w-rth-elektronik/885012205037/732-7532-1-ND/5454159
  C19: ComponentLink1URL=https://www.digikey.com/product-detail/en/yageo/CC0402KRX7R7BB103/311-1042-1-ND/302959
  C23: ComponentLink1URL=https://www.digikey.com/product-detail/en/samsung-electro-mechanics/CL05B333KO5NNNC/1276-1177-1-ND/3889263
  C24 C25: ComponentLink1URL=https://www.digikey.com/product-detail/en/samsung-electro-mechanics/CL10A106MQ8NNNC/1276-1119-1-ND/3889205
  C26: ComponentLink1URL=https://www.digikey.com/product-detail/en/yageo/CC0402JRNPO9BN220/311-1018-1-ND/302935
  C36 C37 C38: ComponentLink1URL=https://www.digikey.com/product-detail/en/samsung-electro-mechanics/CL21A226MQQNNNE/1276-1100-1-ND/3889186
D1: library part "D Schottky", "Schottky Diode", Code_JEDEC=DO-214-AA, ComponentLink1Description=Digikey, ComponentLink1URL=https://www.digikey.com/product-detail/en/on-semiconductor/MBR120ESFT1G/MBR120ESFT1GOSCT-ND/964525, LatestRevisionDate=17-Jul-2002, LatestRevisionNote="Re-released for DXP Platform.", PackageDescription="DO-214-AA/SMB; 2 C-Bend Leads; Body 5.3 x 3.6 mm, inc. leads (LxW)", PackageReference=SMB, Published=8-Jun-2000, Publisher="Altium Limited"
D2 D3: library part LED2, "Typical RED, GREEN, YELLOW, AMBER GaAs LED", LatestRevisionDate=17-Jul-2002, LatestRevisionNote="Re-released for DXP Platform.", PackageDescription="SM LED; 2 Flat Leads", PackageReference=3.2X1.6X1.1, PackageVersion=Feb-2002, Published=8-Jun-2000, Publisher="Altium Limited"
  D2: Digikey PN=160-1406-1-ND, MFG PN=LTST-C150KSKT
  D3: Digikey PN=160-1404-1-ND, MFG PN=LTST-C150KGKT
E1: library part MIFA
FB1 FB2: library part CMP-0686-00557-6, "180 Ohms @ 100MHz 1 Power Line Ferrite Bead 0603 (1608 Metric) 2A 50mOhm", DC Resistance="0.05 Ohm Max.", Manufacturer="TDK Corporation", Operating Temperature Range="-55 to 125 degC", PartNumber=MPZ1608S181ATAH0, Rated Current="2000 mA", ComponentLink2Description=Datasheet, ComponentLink2URL=https://product.tdk.com/info/en/catalog/datasheets/beads_commercial_power_mpz1608_en.pdf, ComponentLink3Description=Digikey, ComponentLink3URL=https://www.digikey.com/product-detail/en/tdk-corporation/MPZ1608S181ATAH0/445-5220-1-ND/2117954, Impedance (at 100 MHz)="180 Ohm +/- 25%", Mounting Technology="Surface Mount", PackageDescription="2-Pin Chip, Body 1.6 x 0.8 mm", Packing="Tape and Reel"
J1 J3: library part Debug_Header
J2: library part CMP-2000-05120-1, "Micro USB B Type Receptacle, 1.8 A, -55 to 85 degC, 5-Pin SMD, RoHS, Tape and Reel", Manufacturer="Amphenol FCI", Package Description="5-Pin Surface Mount Device, Body 8.05 x 5.53 mm, Pitch 0.65 mm", Package Reference=10118194-0001LF-5, Body Orientation=RightAngle, ComponentLink1Description=Digikey, ComponentLink1URL=https://www.digikey.com/product-detail/en/amphenol-icc-fci/10118194-0001LF/609-4618-1-ND/2785382, Datasheet URL=https://datasheet.ciiva.com/26945/getdatasheetpartid-418619-26945695.pdf, Datasheet Version="Rev. A, 10/2011", Gender=RCP, Manufacturer URL=http://www.fci.com/, Mounting=SurfaceMount, Number of Contacts=5, Packaging=CutTape, Pitch=0.65mm, Rad Hard=No, Termination Method=Solder, Type=MicroUSBTypeB
J4: library part CFAF128128B1-0145T, "10-pin 0.5mm pitch FPC for CFAF128128B1 TFT LCD", Contact Resistance=20mOhm, Manufacturer="Wurth Elektronik", Operating Temperature=-25to85degC, Package Reference=68711014022, Rated Current=0.5A, Withstanding Voltage=250VAC, Working Voltage=50VAC, ComponentLink1Description="FPC Digikey", ComponentLink1URL=https://www.digikey.com/product-detail/en/5034801000/WM1389CT-ND/2356643, ComponentLink2Description="LCD MFG", ComponentLink2URL=https://www.crystalfontz.com/product/cfaf128128b10145t-128x128-graphic-tft-spi, Contact Design=TopContact, Datasheet URL=https://katalog.we-online.de/em/datasheet/68711014022.pdf, Manufacturer URL=http://www.we-online.de, Mounting Technology=SMT, Orientation=Horizontal, Packaging=TapeandReel, Part Number=68711014022, Pin Number=10, Pitch=0.5mm, Publisher=WurthElektronik
L1 L2 L3: "High frequency chip inductor ±5%", Part Number=L0402-3n9, ComponentLink1Description=Digikey, Footprint Doc=0402, LatestRevisionDate=2012-09-19, Note="High frequency chip inductor ±5%", Pin Count=2, Published=2009-05-08, Publisher="Nordic Semiconductor"
  L1: ComponentLink1URL=https://www.digikey.com/product-detail/en/delta-electronics-components/0402HC-4N7ECTS/2035-1346-1-ND/10135917
  L2: ComponentLink1URL=https://www.digikey.com/product-detail/en/tdk-corporation/MLZ1608M100WT000/445-6389-1-ND/2465716
  L3: ComponentLink1URL=https://www.digikey.com/product-detail/en/kemet/L0402C15NJRMST/399-9557-1-ND/3674135
L4 L5: library part MAMK2520T1R0M, "Inductor Power Chip Wirewound 1uH 20% 2MHz Metal 2.7A 59mOhm DCR 1008 T/R", Package="2520 Taiyo Yuden", ComponentLink1Description=Digikey, Digi-Key_Part_Number=587-3225-1-ND, Digi-Key_Purchase_URL=https://www.digikey.com/product-detail/en/taiyo-yuden/MAMK2520T1R0M/587-3225-1-ND/3479480?utm_source=snapeda&utm_medium=aggregator&utm_campaign=symbol, MF="Taiyo Yuden", MP=MAMK2520T1R0M, SnapEDA_Link=https://www.snapeda.com/parts/MAMK2520T1R0M/Taiyo%20Yuden/view-part/?ref=snap
  L4: ComponentLink1URL=https://www.digikey.com/product-detail/en/taiyo-yuden/MAMK2520T1R0M/587-3225-1-ND/3479480
  L5: ComponentLink1URL=https://www.digikey.com/product-detail/en/laird-signal-integrity-products/MGV2520122R2M-10/240-3077-1-ND/9559058
LS1: "Buzzers Transducer, Externally Driven Piezo 3V  4kHz 60dB @ 3V, 10cm Through Hole PC Pins", ComponentLink1Description=Digikey, ComponentLink1URL=https://www.digikey.com/product-detail/en/tdk-corporation/PS1240P02BT/445-2525-1-ND/935930, ComponentLink2Description=Datasheet, ComponentLink2URL=https://product.tdk.com/info/en/catalog/datasheets/piezoelectronic_buzzer_ps_en.pdf
NT1: library part MIFA_NET_TIE
P1: library part CMP-2000-05888-1, "Male Header, Pitch 2.5 mm, 1 x 2 Position, Height 7 mm, Tail Length 3.4 mm, -25 to 85 degC, RoHS, Bulk", Manufacturer=JST, Package Description="Male Header, Pitch 2.5 mm, 1 x 2 Position, Height 7 mm, Tail Length 3.4 mm", Package Reference=B2B-XH-A, ComponentLink1Description=Digikey, ComponentLink1URL=https://www.digikey.com/product-detail/en/jst-sales-america-inc/B2B-XH-A-LF-SN/455-2247-ND/1651045, ComponentLink2Description=Datasheet, ComponentLink2URL=http://www.jst-mfg.com/product/pdf/eng/eXH.pdf, Datasheet URL=http://www.jst-mfg.com/product/pdf/eng/eXH.pdf, Datasheet Version=05/2016, Manufacturer URL=http://www.jst.com/home2.html, Mounting Technology=ThroughHole, No of Positions=2, Pitch=2.5mm, Style/Orientation=StraightHeader/Plug, Termination=Crimp, Type=ShroudedHeader
P2: "Header, 2-Pin", LatestRevisionDate=17-Jul-2002, LatestRevisionNote="Re-released for DXP Platform.", Publisher="Altium Limited"
P3 P6 P8: library part "Header 2", "Header, 2-Pin", LatestRevisionDate=17-Jul-2002, LatestRevisionNote="Re-released for DXP Platform.", Publisher="Altium Limited"
P5: "Header, 3-Pin", LatestRevisionDate=17-Jul-2002, LatestRevisionNote="Re-released for DXP Platform.", Publisher="Altium Limited"
Q1: "P-Channel 20V 6A (Ta) 1W (Ta) Surface Mount SOT-23F", ComponentLink1Description=Digikey, ComponentLink1URL=https://www.digikey.com/product-detail/en/toshiba-semiconductor-and-storage/SSM3J378R-LF/SSM3J378RLFCT-ND/9866097, ComponentLink2Description=Datasheet, ComponentLink2URL=https://toshiba.semicon-storage.com/info/docget.jsp?did=59205&prodName=SSM3J378R
Q2 Q3: "N-Channel 60V 270mA (Ta), 330mA (Tc) 310mW (Ta), 1.67W (Tc) Surface Mount TO-236AB", ComponentLink1Description=Digikey, ComponentLink1URL=https://www.digikey.com/product-detail/en/nexperia-usa-inc/2N7002NXBKR/1727-8642-1-ND/10416559, ComponentLink2Description=Datasheet, ComponentLink2URL=https://assets.nexperia.com/documents/data-sheet/2N7002NXBK.pdf
R1 R2 R3 R4 R5 R6 R7 R8 R9 R10 R11 R12 R13 R14 R20 R21 R22: library part Resistor, "Resistor", ComponentLink1Description=Digikey, LatestRevisionDate=17-Jul-2002, LatestRevisionNote="Re-released for DXP Platform.", PackageDescription="Axial Device, Thru-Hole; 2 Leads; 0.4 in Pin Spacing", PackageReference=AXIAL-0.4, Published=8-Jun-2000, Publisher="Altium Limited"
  R1 R2 R3 R9 R10 R11 R12 R13 R21 R22: ComponentLink1URL=https://www.digikey.com/product-detail/en/yageo/RC0402JR-0710KL/311-10KJRCT-ND/729365
  R4: ComponentLink1URL=https://www.digikey.com/product-detail/en/yageo/RC0603FR-074M02L/YAG5698CT-ND/7563718
  R5: ComponentLink1URL=https://www.digikey.com/product-detail/en/yageo/RC0603JR-0710ML/311-10MGRCT-ND/729648
  R6: ComponentLink1URL=https://www.digikey.com/product-detail/en/panasonic-electronic-components/ERJ-2BWFR068X/P.068ATCT-ND/1705799
  R7: ComponentLink1URL=https://www.digikey.com/product-detail/en/stackpole-electronics-inc/RMCF0603FT210K/RMCF0603FT210KCT-ND/2417983
  R8: ComponentLink1URL=https://www.digikey.com/product-detail/en/stackpole-electronics-inc/RMCF0603FT47K0/RMCF0603FT47K0CT-ND/1943099
  R14 R20: ComponentLink1URL=https://www.digikey.com/product-detail/en/yageo/RC0402FR-07100KL/311-100KLRCT-ND/729473
R15 R16 R17 R18 R19: "0 Ohms Jumper Chip Resistor 0603 (1608 Metric) Automotive AEC-Q200, Moisture Resistant Metal Element", ComponentLink1Description=Digikey, ComponentLink1URL=https://www.digikey.com/product-detail/en/koa-speer-electronics-inc/RK73Z1JTTD/2019-RK73Z1JTTDCT-ND/9847522, LatestRevisionDate=17-Jul-2002, LatestRevisionNote="Re-released for DXP Platform.", PackageDescription="Axial Device, Thru-Hole; 2 Leads; 0.4 in Pin Spacing", PackageReference=AXIAL-0.4, Published=8-Jun-2000, Publisher="Altium Limited"
S3: library part SW_CK_PTS645VJK612LFS, "Tactile Switch SPST-NO Side Actuated Through Hole, Right Angle", ComponentLink1Description=Digikey, ComponentLink1URL=https://www.digikey.com/product-detail/en/c-k/PTS645VJK612LFS/CKN10826-ND/7056048, ComponentLink2Description=Datasheet, ComponentLink2URL=https://dznh3ojzb2azq.cloudfront.net/products/Tactile/PTS645/documents/datasheet.pdf
TP2: "Test point as a via"
U1: library part NRSC-NRF52840-AQFN-73, "RF System on a Chip, 1.7 to 3.6 V, -40 to 85 degC, 73-Pin AQFN, RoHS, Tape and Reel", Manufacturer="Nordic Semiconductor", Package Description="73-Pin Array Quad Flat No-lead Package, Body 7 x 7 mm, Pitch 0.5 mm", Package Reference=AQFN, Datasheet URL=http://infocenter.nordicsemi.com/pdf/nRF52840_OPS_v0.5.1.pdf, Datasheet Version="Rev. 0.5.1, 07/2017", Manufacturer URL=http://www.nordicsemi.com/eng/Products/, Mounting Technology=SurfaceMount, RoHSCompliant=false
U2: "Charger IC Lithium Ion/Polymer 20-DSBGA (2.1x2)", ComponentLink1Description=Digikey, ComponentLink1URL=https://www.digikey.com/product-detail/en/texas-instruments/BQ24157YFFR/296-39908-1-ND/5177785, ComponentLink2Description=Datasheet, ComponentLink2URL=http://www.ti.com/lit/ds/symlink/bq24157.pdf, ComponentLink3Description="MFG Page", ComponentLink3URL=https://www.ti.com/product/BQ24157
U3: library part ESD7002WTT1G, "Clamp  Ipp Tvs Diode Surface Mount SC-70-3 (SOT323)", ComponentLink1Description=Digikey, ComponentLink1URL=https://www.digikey.com/product-detail/en/on-semiconductor/ESD7002WTT1G/ESD7002WTT1GOSCT-ND/5801809, ComponentLink2Description=Datasheet, ComponentLink2URL=https://www.onsemi.com/pub/Collateral/ESD7002-D.PDF
U4: "14V Clamp 2.5A (8/20µs) Ipp Tvs Diode Surface Mount 2-X1SON (1x.60)", ComponentLink1Description=Digikey, ComponentLink1URL=https://www.digikey.com/product-detail/en/texas-instruments/TPD1E05U06DPYR/296-39341-1-ND/5143293, ComponentLink2Description=Datasheet, ComponentLink2URL=http://www.ti.com/lit/ds/symlink/tpd1e05u06.pdf
U6: library part IS25LQ040B-JNLE, "FLASH - NOR Memory IC 4Mb (512K x 8) SPI - Quad I/O 104MHz  8-SOIC", ComponentLink1Description=Digikey, ComponentLink1URL=https://www.digikey.com/product-detail/en/issi-integrated-silicon-solution-inc/IS25LQ040B-JNLE/706-1316-ND/5189751, ComponentLink2Description=Datasheet, ComponentLink2URL=http://www.issi.com/WW/pdf/25LQ025B-512B-010B-020B-040B.pdf
U7: library part DRV5053VAQDBZR, "Hall Effect Sensor Single Axis SOT-23-3", ComponentLink1Description=Digikey, ComponentLink1URL=https://www.digikey.com/product-detail/en/texas-instruments/DRV5053VAQDBZR/296-38460-1-ND/5022225, ComponentLink2Description=Datasheet, ComponentLink2URL=http://www.ti.com/lit/ds/symlink/drv5053.pdf
U8: "Buck Switching Regulator IC Positive Adjustable 0.6V 1 Output 2A SOT-23-5 Thin, TSOT-23-5", ComponentLink1Description=Digikey, ComponentLink1URL=https://www.digikey.com/product-detail/en/diodes-incorporated/AP3429AKTTR-G1/AP3429AKTTR-G1DICT-ND/5359842, ComponentLink2Description=Datasheet, ComponentLink2URL=https://www.diodes.com/assets/Datasheets/AP3429.pdf
X1: "XTAL SMD 3215, 32.768kHz, Cl=9pF, Total Tol: ±50ppm", Part Number=XTAL_SMD3215_32.768kHz_9pF_General, ComponentLink1Description=Digikey, ComponentLink1URL=https://www.digikey.com/product-detail/en/epson/FC-135-32.768KA-AG0/SER4089CT-ND/6132709, ComponentLink2Description=Datasheet, ComponentLink2URL=https://support.epson.biz/td/api/doc_check.php?dl=brief_FC-135&lang=en, Footprint Doc=XTAL_3215, LatestRevisionDate=2016-08-19, Pin Count=2, Published=2016-08-19, Publisher="Nordic Semiconductor"
X2: "XTAL SMD 2016, 32MHz, Cl=8pF, Total Tol: ±40ppm", Part Number=XTAL_SMD2016_32MHz_8pF_General, ComponentLink1Description=Digikey, ComponentLink1URL=https://www.digikey.com/product-detail/en/ecs-inc/ECS-320-8-37B-CKY-TR/XC3067CT-ND/9838882, ComponentLink2Description=Datasheet, ComponentLink2URL=https://ecsxtal.com/store/pdf/ECX-1637B.pdf, Footprint Doc=XTAL_2016, LatestRevisionDate=2016-08-19, Pin Count=4, Published=2016-08-19, Publisher="Nordic Semiconductor"

## Free pads (board coordinates)
  round 3.727 hole 3.727: 1(69.784,127.961) 1(88.874,18.193)

## Via types
v1: diameter 0.61, hole 0.305, Top Layer to Bottom Layer, 110 vias
v2: diameter 0.33, hole 0.203, Top Layer to Bottom Layer, 13 vias
v3: diameter 0.61, hole 0.305, Top Layer to Bottom Layer, tented both sides, 1 vias
v4: diameter 0.762, hole 0.381, Top Layer to Bottom Layer, 1 vias

## Nets (pads, with @x,y where several pads share a name; then routed paths per layer and width w, separated by ;. In a path a pad name is that pad's centre, name@x,y a point inside that pad or via, vN(x,y) a via of type N, cw(c..) or ccw(c..) an arc to the next point about the centre after c; other vN are vias at no path point)
3.3V: C14.1 C15.1 C16.1 C17.1 C18.2 C31.2 C33.2 C35.2 J1.5 J4.4 LS1.1 P2.1 Q3.3 R1.2 R2.2 R3.2 R9.2 R10.2 R11.2 R12.2 R13.2 R15.2 R21.2 R22.2 U1.A22 U1.AD14 U1.AD23 U1.B1 U1.W1 U1.Y2 U6.8 U7.1 | length 43.2
  Top Layer w0.25: v1(56.004,122.425) 56.011,122.432 56.765,122.432 56.681,122.348 56.681,121.379 U1.AD23@56.676,121.374 U1.AD23@56.671,121.379 ; C17.1@56.667,122.538 C17.1@56.696,122.509 ; U1.A22@57.176,114.874 57.181,114.869 57.181,113.505 C16.1@57.232,113.454 57.282,113.454 57.69,113.046 57.69,111.849 v1(57.685,111.845) ; v1(58.198,122.639) 58.236,122.601 59.119,122.601 59.171,122.548 59.171,121.379 U1.AD14@59.176,121.374 ; U1.Y2@62.176,120.124 62.926,120.124 ; U1.B1@62.676,115.374 63.877,114.173 C14.1@64.678,114.173 64.928,113.923 64.928,113.427 65.1,113.254 v1(65.1,113.157) ; U1.W1@62.676,119.874 62.926,120.124 ; 64.455,121.939 64.43,121.939 64.18,121.689 64.18,121.378 62.926,120.124 ; C15.1@64.897,121.931 64.967,121.861 64.992,121.886 v1(66.177,121.886) ; J4.4@73.05,53.553 73.075,53.578 74.896,53.578 C35.2@74.981,53.662 75.023,53.704 76.006,53.704 v1(76.048,53.746) 76.116,53.815 76.116,54.413 R15.2@76.315,54.612 ; R22.2@82.042,23.081 v1(82.042,23.825) ; R21.2@84.76,23.081 v1(84.76,23.825) ; R3.2@86.766,22.674 86.792,22.7 86.792,24.13 v1(86.817,24.155) ; R1.2@88.189,22.674 88.201,22.687 88.201,24.143 v1(88.214,24.155) ; R2.2@89.586,22.674 89.598,22.687 89.598,24.143 v1(89.611,24.155)
  Top Layer w0.381: v1(75.87,58.42) 75.886,58.436 75.886,59.242 Q3.3@75.902,59.258
  Top Layer w0.508: R10.2@62.89,97.417 62.89,97.375 64.467,95.798 LS1.1@70.129,95.798 ; v1(66.04,87.554) R12.2@66.861,87.554 ; v1(70.536,65.989) R11.2@71.357,65.989 ; v1(70.968,70.536) 70.995,70.536 71.016,70.514 71.835,70.514 R9.2@71.839,70.51 ; v1(70.993,74.752) R13.2@71.915,74.752 ; v1(74.473,113.894) 74.479,113.894 75.07,114.484 75.076,114.484 75.081,114.479 75.087,114.479 U7.1@76.03,115.423 ; U6.8@80.271,129.083 82.013,129.083 82.017,129.079 C31.2@82.017,129.075 82.021,129.079 83.079,129.079 v1(83.083,129.083)
  other v1: 72.187,16.154 73.203,16.154 72.187,17.348 73.203,17.348
A8: C19.1 R4.1 R5.2 U1.A8 | length 98
  Top Layer w0.178: U1.A8@60.676,114.85 v2(60.676,114.862) U1.A8@60.676,114.874 ; v1(80.002,29.854) 80.002,29.713 79.755,29.466 79.755,28.355 80.239,27.871 C19.1@80.239,27.821 ; C19.1@80.366,27.796 80.434,27.864 81.255,27.864 ; R4.1@81.255,27.319 81.255,27.864 ; R5.2@81.255,28.408 81.255,27.864
  Bottom Layer w0.178: v2(60.676,114.862) 60.704,114.833 61.722,114.833 80.002,96.553 v1(80.002,29.854)
A10: Q2.1 U1.A10 | length 11.8
  Top Layer w0.178: 60.047,114.72 59.647,114.319 59.647,106.323 61.692,104.277 Q2.1@61.842,104.277 ; 60.047,114.721 60.176,114.85 U1.A10@60.176,114.874
A12: C34.2 P8.1 R13.1 U1.A12 | length 49.6
  Top Layer w0.178: 59.547,114.72 59.309,114.482 59.309,99.492 73.99,84.811 C34.2@73.99,74.82 ; 59.547,114.721 59.676,114.85 U1.A12@59.676,114.874
  Top Layer w0.254: R13.1@72.915,74.752 72.927,74.752 73.05,74.629 73.05,73.931 ; P8.1@73.05,72.771 73.05,73.931 ; C34.2@73.99,74.82 C34.2@73.947,74.778 73.897,74.778 73.05,73.931
A14: C29.2 P3.1 R9.1 U1.A14 | length 59.8
  Top Layer w0.178: 59.047,114.72 58.946,114.619 58.946,99.371 73.584,84.734 73.584,76.022 73.304,75.743 70.714,75.743 69.85,74.879 69.85,72.441 71.12,71.171 73.135,71.171 C29.2@73.821,70.485 ; 59.047,114.721 59.176,114.85 U1.A14@59.176,114.874
  Top Layer w0.254: R9.1@72.839,70.51 72.961,70.387 73,70.387 73,69.723 ; P3.1@73,68.504 73,69.723 ; C29.2@73.821,70.485 C29.2@73.871,70.485 73.748,70.362 73.639,70.362 73,69.723